# EAGLE board obstacle_avoiding_robot (EAGLE 6.1)
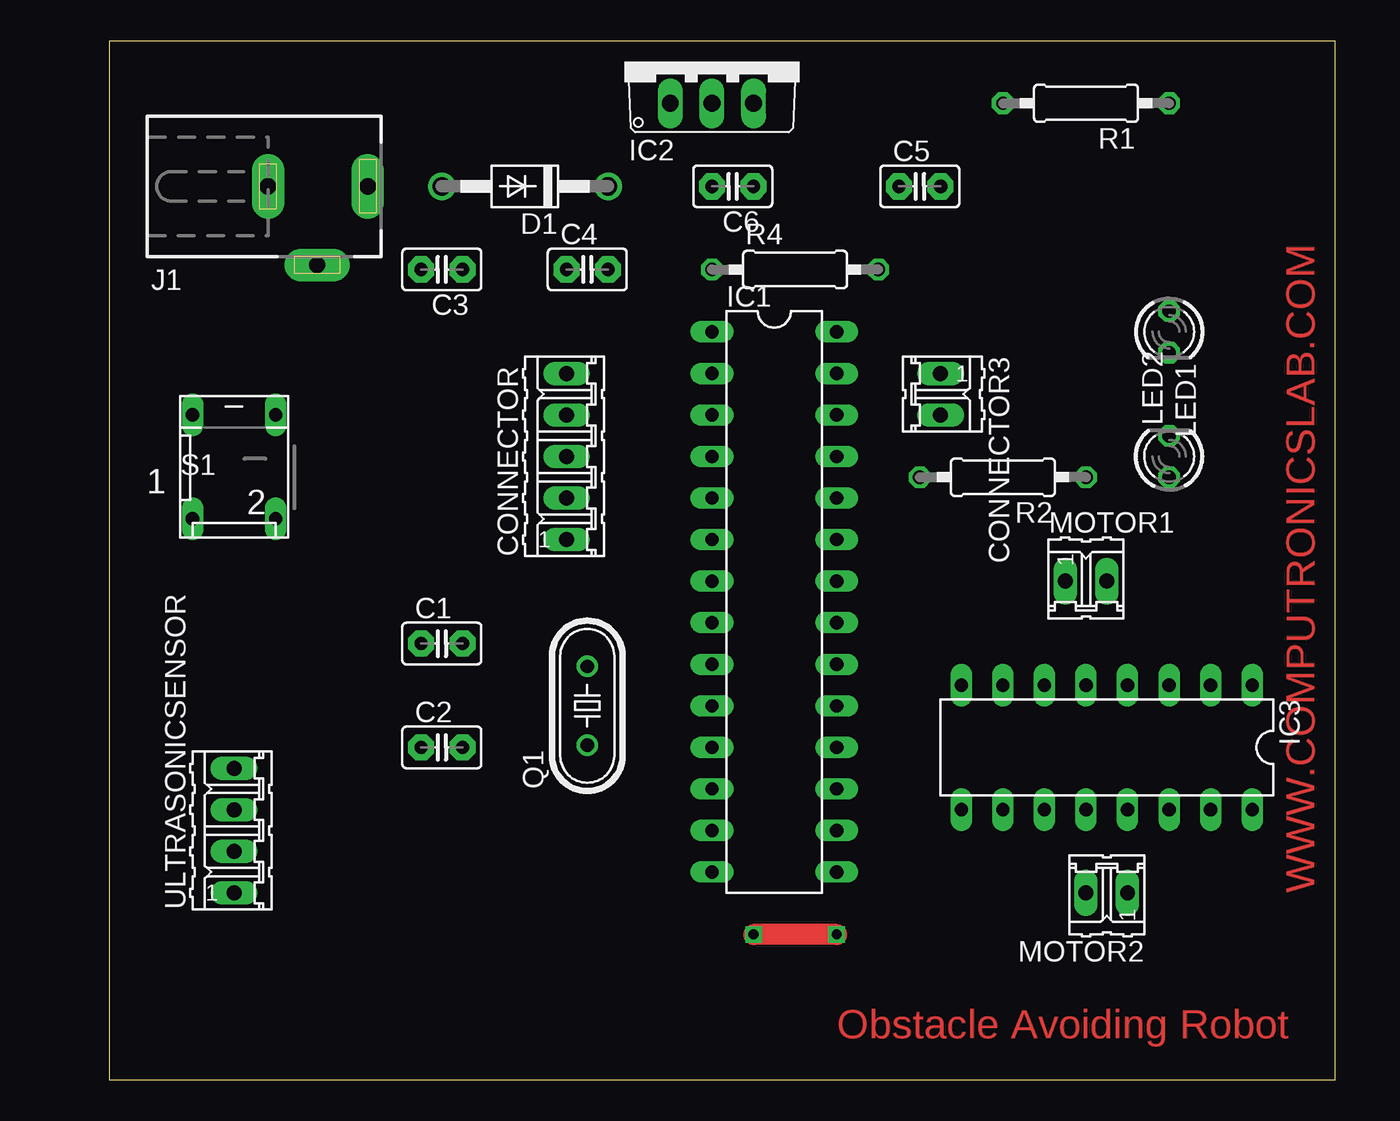
[diagram p0: board, top side]
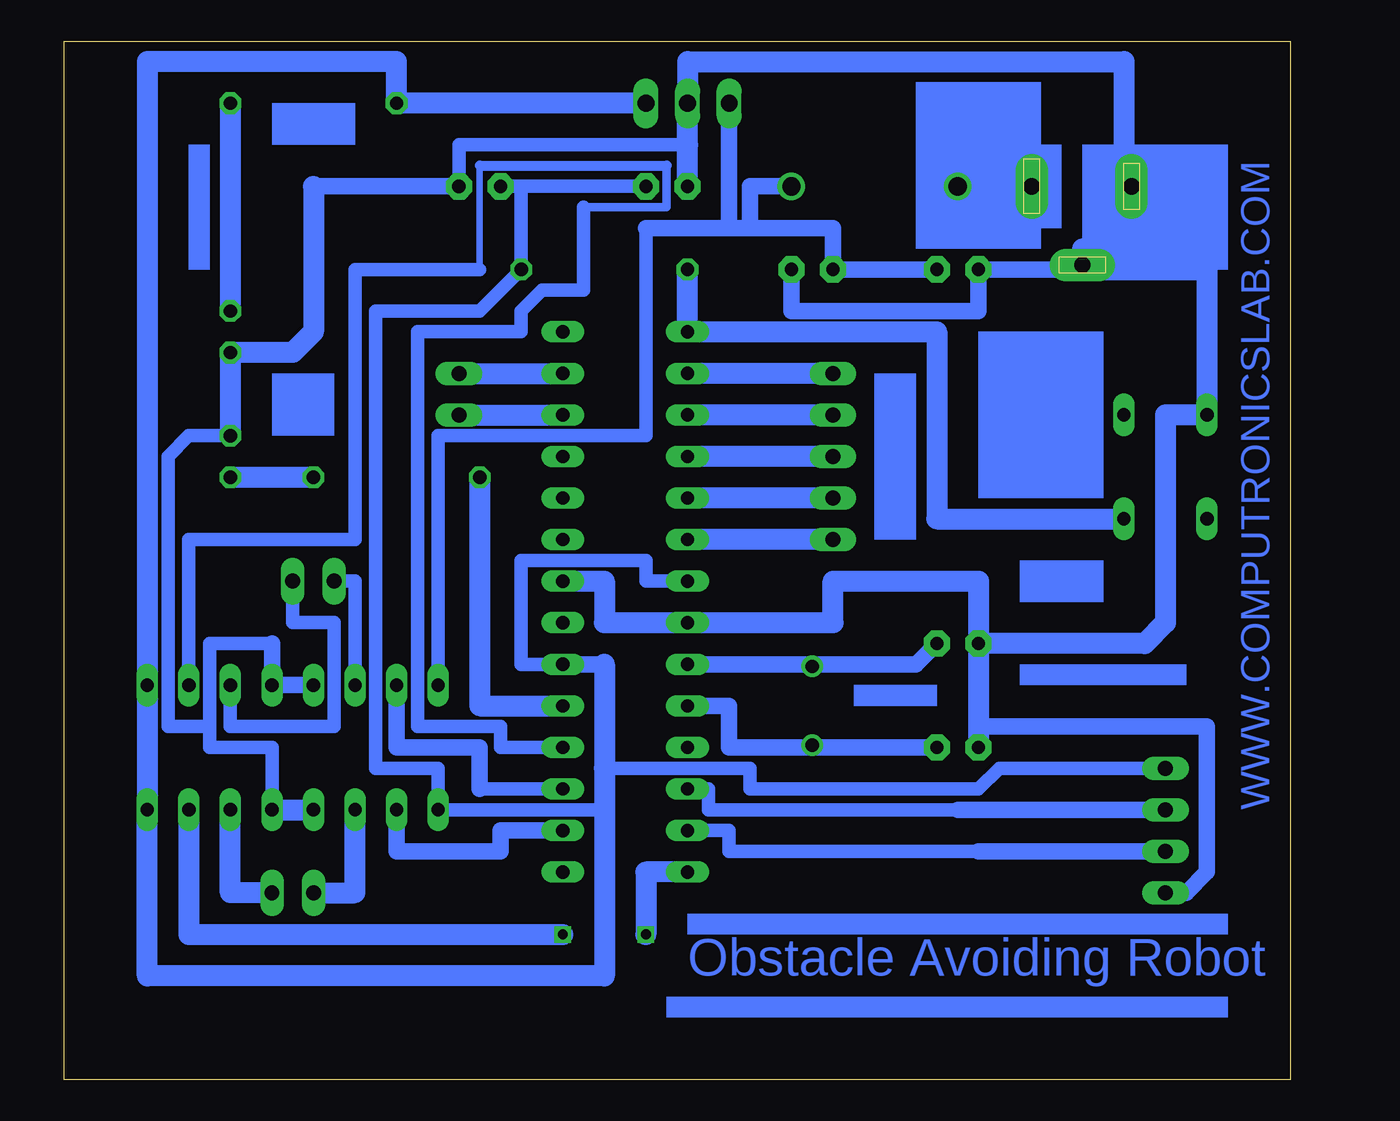
[diagram p1: board, bottom side, seen from below]

Size 74.93 x 63.49 mm. Coordinates in mm from the lower left corner, seen from the top.
Outline: 0,0 74.93,0 74.93,63.49 0,63.49 0,0
Copper layers (1*16): Top 0.035mm / dielectric 1.5mm / Bottom 0.035mm
Design rules: minimum track width 15mil, minimum drill 24mil, track to track 8mil, track to pad 8mil, pad to pad 8mil, via to via 8mil, smd to smd 8mil, copper to edge 40mil, drill to drill 8mil, minimum pad ring 10mil, minimum via ring 8mil, stop-mask expansion 4mil, vias tented up to drill 0mil, thermal gap 10mil

## Footprints (pad centres in the part's own frame; a part is rotated, then mirrored left to right if it is on the bottom)
C2.5-2 = drill 0.813 pad 1.6 octagon: 1 -1.27,0; 2 1.27,0
05P = drill 0.914 long: 1 -5.08,0; 2 -2.54,0; 3 0,0; 4 2.54,0; 5 5.08,0
02P = drill 0.914 long: 1 -1.27,0; 2 1.27,0
DO41-10 = drill 1.118: A 5.08,0; C -5.08,0
DIL28-3 = drill 0.813 long: 1 -16.51,-3.81; 2 -13.97,-3.81; 3 -11.43,-3.81; 4 -8.89,-3.81; 5 -6.35,-3.81; 6 -3.81,-3.81; 7 -1.27,-3.81; 8 1.27,-3.81; 9 3.81,-3.81; 10 6.35,-3.81; 11 8.89,-3.81; 12 11.43,-3.81; 13 13.97,-3.81; 14 16.51,-3.81; 15 16.51,3.81; 16 13.97,3.81; 17 11.43,3.81; 18 8.89,3.81; 19 6.35,3.81; 20 3.81,3.81; 21 1.27,3.81; 22 -1.27,3.81; 23 -3.81,3.81; 24 -6.35,3.81; 25 -8.89,3.81; 26 -11.43,3.81; 27 -13.97,3.81; 28 -16.51,3.81
TO220V = drill 1.016 long: 1 -2.54,-2.54; 2 0,-2.54; 3 2.54,-2.54
DIL16 = drill 0.813 long: 1 -8.89,-3.81; 2 -6.35,-3.81; 3 -3.81,-3.81; 4 -1.27,-3.81; 5 1.27,-3.81; 6 3.81,-3.81; 7 6.35,-3.81; 8 8.89,-3.81; 9 8.89,3.81; 10 6.35,3.81; 11 3.81,3.81; 12 1.27,3.81; 13 -1.27,3.81; 14 -3.81,3.81; 15 -6.35,3.81; 16 -8.89,3.81
DCJ0303 = drill 1 pad 2 long: 1 0,3.1; 2 4.8,0; 3 0,-3
LED3MM = drill 0.813 octagon: A -1.27,0; K 1.27,0
HC49/S = drill 0.813: 1 -2.413,0; 2 2.413,0
0207/10 = drill 0.813 octagon: 1 -5.08,0; 2 5.08,0
DP-02 = drill 0.813 long: 1 -2.54,-2.54; 2 2.54,-2.54; 3 2.54,3.81; 4 -2.54,3.81
04P = drill 0.914 long: 1 -3.81,0; 2 -1.27,0; 3 1.27,0; 4 3.81,0

## Placement (x,y rotation side)
C1  22pf  [C2.5-2]  20.32,26.67 0 top
C2  22pf  [C2.5-2]  20.32,20.32 0 top
C3  470uF  [C2.5-2]  20.32,49.53 180 top
C4  0.1uf  [C2.5-2]  29.21,49.53 0 top
C5  0.1uf  [C2.5-2]  49.53,54.61 0 top
C6  4.7uf  [C2.5-2]  38.1,54.61 180 top
CONNECTOR  6 pin  [05P]  27.94,38.1 90 top
CONNECTOR3  [02P]  50.8,41.91 270 top
D1  1N4007  [DO41-10]  25.4,54.61 180 top
IC1  ATMEGA328  [DIL28-3]  40.64,29.21 270 top
IC2  7805  [TO220V]  36.83,62.23 0 top
IC3  L293D  [DIL16]  60.96,20.32 180 top
J1  [DCJ0303]  12.7,54.61 270 top
LED1  3mm  [LED3MM]  64.77,45.72 270 top
LED2  3mm  [LED3MM]  64.77,38.1 90 top
MOTOR1  [02P]  59.69,30.48 0 top
MOTOR2  [02P]  60.96,11.43 180 top
Q1  16MHZ  [HC49/S]  29.21,22.86 90 top
R1  220R  [0207/10]  59.69,59.69 180 top
R2  330R  [0207/10]  54.61,36.83 180 top
R4  10K  [0207/10]  41.91,49.53 0 top
S1  push switch  [DP-02]  7.62,36.83 0 top
ULTRASONICSENSOR  4 pin  [04P]  7.62,15.24 90 top

## Library data of the parts
C1-C6 = capacitor-wima
CONNECTOR CONNECTOR3 MOTOR1 MOTOR2 ULTRASONICSENSOR = con-amp-quick; OC_FARNELL: unknown; OC_NEWARK: unknown
D1 = diode
IC1 = quantum-research-group; OC_FARNELL: unknown; OC_NEWARK: unknown
IC2 = linear
IC3 = st-microelectronics; MPN: L293D; OC_FARNELL: 9589619; OC_NEWARK: 56P8249
J1 = con-jack; OC_FARNELL: unknown; OC_NEWARK: unknown
LED1 LED2 = led
Q1 = crystal; OC_FARNELL: 1667008; OC_NEWARK: unknown
R1 R2 R4 = rcl
S1 = switch-dil; MPN: MCDP02; OC_FARNELL: 1255233; OC_NEWARK: 26M1095

## Nets
N$1: C1.2 IC1.9 Q1.2
N$2: C2.2 IC1.10 Q1.1
N$3: D1.A J1.1
N$4: C3.1 C4.1 D1.C IC2.1 IC3.8
N$5: C1.1 C2.1 C3.2 C4.2 C5.2 C6.2 IC1.8 IC1.22 IC2.2 IC3.4 IC3.5 IC3.12 IC3.13 J1.2 J1.3 LED1.K LED2.K S1.4 ULTRASONICSENSOR.1
N$6: LED1.A R1.1
N$7: IC1.17 IC3.7
N$8: CONNECTOR.1 IC1.6
N$9: CONNECTOR.2 IC1.5
N$10: CONNECTOR.3 IC1.4
N$11: CONNECTOR.4 IC1.3
N$12: CONNECTOR3.1 IC1.27
N$13: CONNECTOR3.2 IC1.26
N$14: CONNECTOR.5 IC1.2
N$15: IC1.18 IC3.2
N$16: IC1.14 IC3.15
N$17: IC1.12 ULTRASONICSENSOR.3
N$18: IC1.13 ULTRASONICSENSOR.2
N$21: IC1.16 IC3.10
N$25: IC3.14 MOTOR2.1
N$27: IC1.19 R2.2
N$28: IC3.11 MOTOR2.2
N$31: IC1.1 R4.1 S1.2
N$32: LED2.A R2.1
N$33: C5.1 C6.1 IC1.7 IC1.20 IC2.3 IC3.1 IC3.9 IC3.16 R1.2 R4.2 ULTRASONICSENSOR.4
N$34: IC3.6 MOTOR1.1
N$35: IC3.3 MOTOR1.2

## Tracks (layer width: path | path; a pad name or v marks a point on that pad's centre or on a via)
N$1
  Bottom 0.381: 29.21,25.4 Q1.2
  Bottom 1.016: IC1.9 29.21,25.4 22.86,25.4 C1.2
N$2
  Bottom 0.381: 29.21,20.32 Q1.1
  Bottom 1.016: C2.2 29.21,20.32 34.29,20.32 34.29,22.86 IC1.10
N$3
  Bottom 1.016: J1.1 D1.A
N$4
  Bottom 0.813: IC3.8 52.07,39.37 39.37,39.37 39.37,52.07
  Bottom 1.016: C3.1 C4.1 27.94,52.07 33.02,52.07 | 33.02,52.07 34.29,52.07 | 34.29,52.07 39.37,52.07 | D1.C 33.02,54.61 33.02,52.07 | 34.29,52.07 IC2.1
N$5
  Bottom 0.381: 12.7,49.53 J1.2
  Bottom 0.813: IC3.13 62.23,20.32 66.04,20.32 66.04,21.59 | 66.04,21.59 66.04,26.67 62.23,26.67 | C5.2 50.8,57.15 36.83,57.15 | 66.04,21.59 68.58,21.59 68.58,38.1 67.31,39.37 LED2.K
  Bottom 1.016: ULTRASONICSENSOR.1 6.35,11.43 5.08,12.7 5.08,21.59 19.05,21.59 C2.1 | 12.7,49.53 C3.2 19.05,46.99 30.48,46.99 C4.2 | IC3.5 IC3.4 62.23,26.67 | C5.2 59.69,54.61
  Bottom 1.27: IC1.22 41.91,30.48 41.91,27.94 IC1.8 27.94,27.94 27.94,30.48 19.05,30.48 C1.1 | C1.1 C2.1 | 12.7,49.53 5.08,49.53 S1.4 7.62,40.64 7.62,27.94 8.89,26.67 C1.1 | 10.16,54.61 10.16,50.8 12.7,50.8 J1.2 | IC3.13 IC3.12 | LED2.K LED1.K 60.96,44.45 59.69,45.72 59.69,54.61 | C6.2 36.83,57.15 IC2.2 36.83,62.23 10.16,62.23 10.16,54.61 | 10.16,54.61 J1.3
N$6
  Bottom 1.27: R1.1 LED1.A
N$7
  Bottom 0.813: 49.53,17.78 IC1.17
  Bottom 1.016: 49.53,17.78 49.53,20.32 54.61,20.32 IC3.7
N$8
  Bottom 1.27: CONNECTOR.1 IC1.6
N$9
  Bottom 1.27: CONNECTOR.2 IC1.5
N$10
  Bottom 1.27: CONNECTOR.3 IC1.4
N$11
  Bottom 1.27: CONNECTOR.4 IC1.3
N$12
  Bottom 1.27: CONNECTOR3.1 IC1.27
N$13
  Bottom 1.27: CONNECTOR3.2 IC1.26
N$14
  Bottom 1.27: CONNECTOR.5 IC1.2
N$15
  Bottom 0.406: 49.53,49.53 49.53,55.88
  Bottom 0.508: 43.18,53.34 38.1,53.34 38.1,55.88
  Bottom 0.61: 49.53,55.88 38.1,55.88
  Bottom 0.813: IC1.18 48.26,20.32 48.26,21.59 53.34,21.59 53.34,45.72 46.99,45.72 46.99,46.99 45.72,48.26 43.18,48.26 43.18,53.34 | 49.53,49.53 57.15,49.53 57.15,33.02 67.31,33.02 IC3.2
N$16  (via drill 0.6)
  Top 1.27: v44.45,8.89 v39.37,8.89
  Bottom 1.27: v44.45,8.89 67.31,8.89 IC3.15 | IC1.14 39.37,12.7 v39.37,8.89
N$17
  Bottom 0.813: IC1.12 35.56,17.78 35.56,16.51 20.32,16.51
  Bottom 1.016: ULTRASONICSENSOR.3 16.51,16.51 20.32,16.51
N$18
  Bottom 0.813: IC1.13 34.29,15.24 34.29,13.97 31.75,13.97 19.05,13.97
  Bottom 1.016: ULTRASONICSENSOR.2 19.05,13.97
N$21
  Bottom 1.016: IC1.16 48.26,15.24 48.26,13.97 54.61,13.97 IC3.10
N$25
  Bottom 1.27: IC3.14 64.77,11.43 MOTOR2.1
N$27
  Bottom 1.27: IC1.19 49.53,22.86 R2.2
N$28
  Bottom 1.27: IC3.11 57.15,11.43 MOTOR2.2
N$31
  Bottom 1.27: S1.2 21.59,34.29 21.59,45.72 IC1.1 R4.1
N$32
  Bottom 1.27: LED2.A R2.1
N$33
  Bottom 0.813: 46.99,54.61 R4.2 49.53,46.99 55.88,46.99 55.88,19.05 52.07,19.05 IC3.9 41.91,16.51 | C5.1 46.99,54.61 | 46.99,54.61 C6.1 | IC1.7 39.37,30.48 39.37,31.75 46.99,31.75 46.99,25.4 IC1.20 | 41.91,19.05 33.02,19.05 33.02,17.78 19.05,17.78 17.78,19.05 ULTRASONICSENSOR.4
  Bottom 1.016: IC1.20 41.91,25.4
  Bottom 1.27: IC2.3 R1.2 54.61,62.23 69.85,62.23 IC3.1 IC3.16 69.85,6.35 41.91,6.35 41.91,16.51 41.91,19.05 41.91,25.4
N$34
  Bottom 0.813: IC3.6 57.15,30.48 MOTOR1.1
N$35
  Bottom 0.813: IC3.3 64.77,21.59 58.42,21.59 58.42,27.94 60.96,27.94 MOTOR1.2
(copper drawn outside any net)
  shapes: Bottom area x14

## Text on the board
Top: WWW.COMPUTRONICSLAB.COM | Obstacle Avoiding Robot
Bottom: WWW.COMPUTRONICSLAB.COM | Obstacle Avoiding Robot